# Altium PCB SNA.PcbDoc (part 2 of 6)
Units mm, origin at the board's own origin, x right, y up, seen from the top; angles counter-clockwise.
Board outline 122 x 98 mm, 4 copper layers (L1 Top Layer, L2 Inner 1, L3 Inner 2, L4 Bottom Layer), stack 1.588 mm thick; 466 components, 299 nets, 1366 pads, 4218 vias.
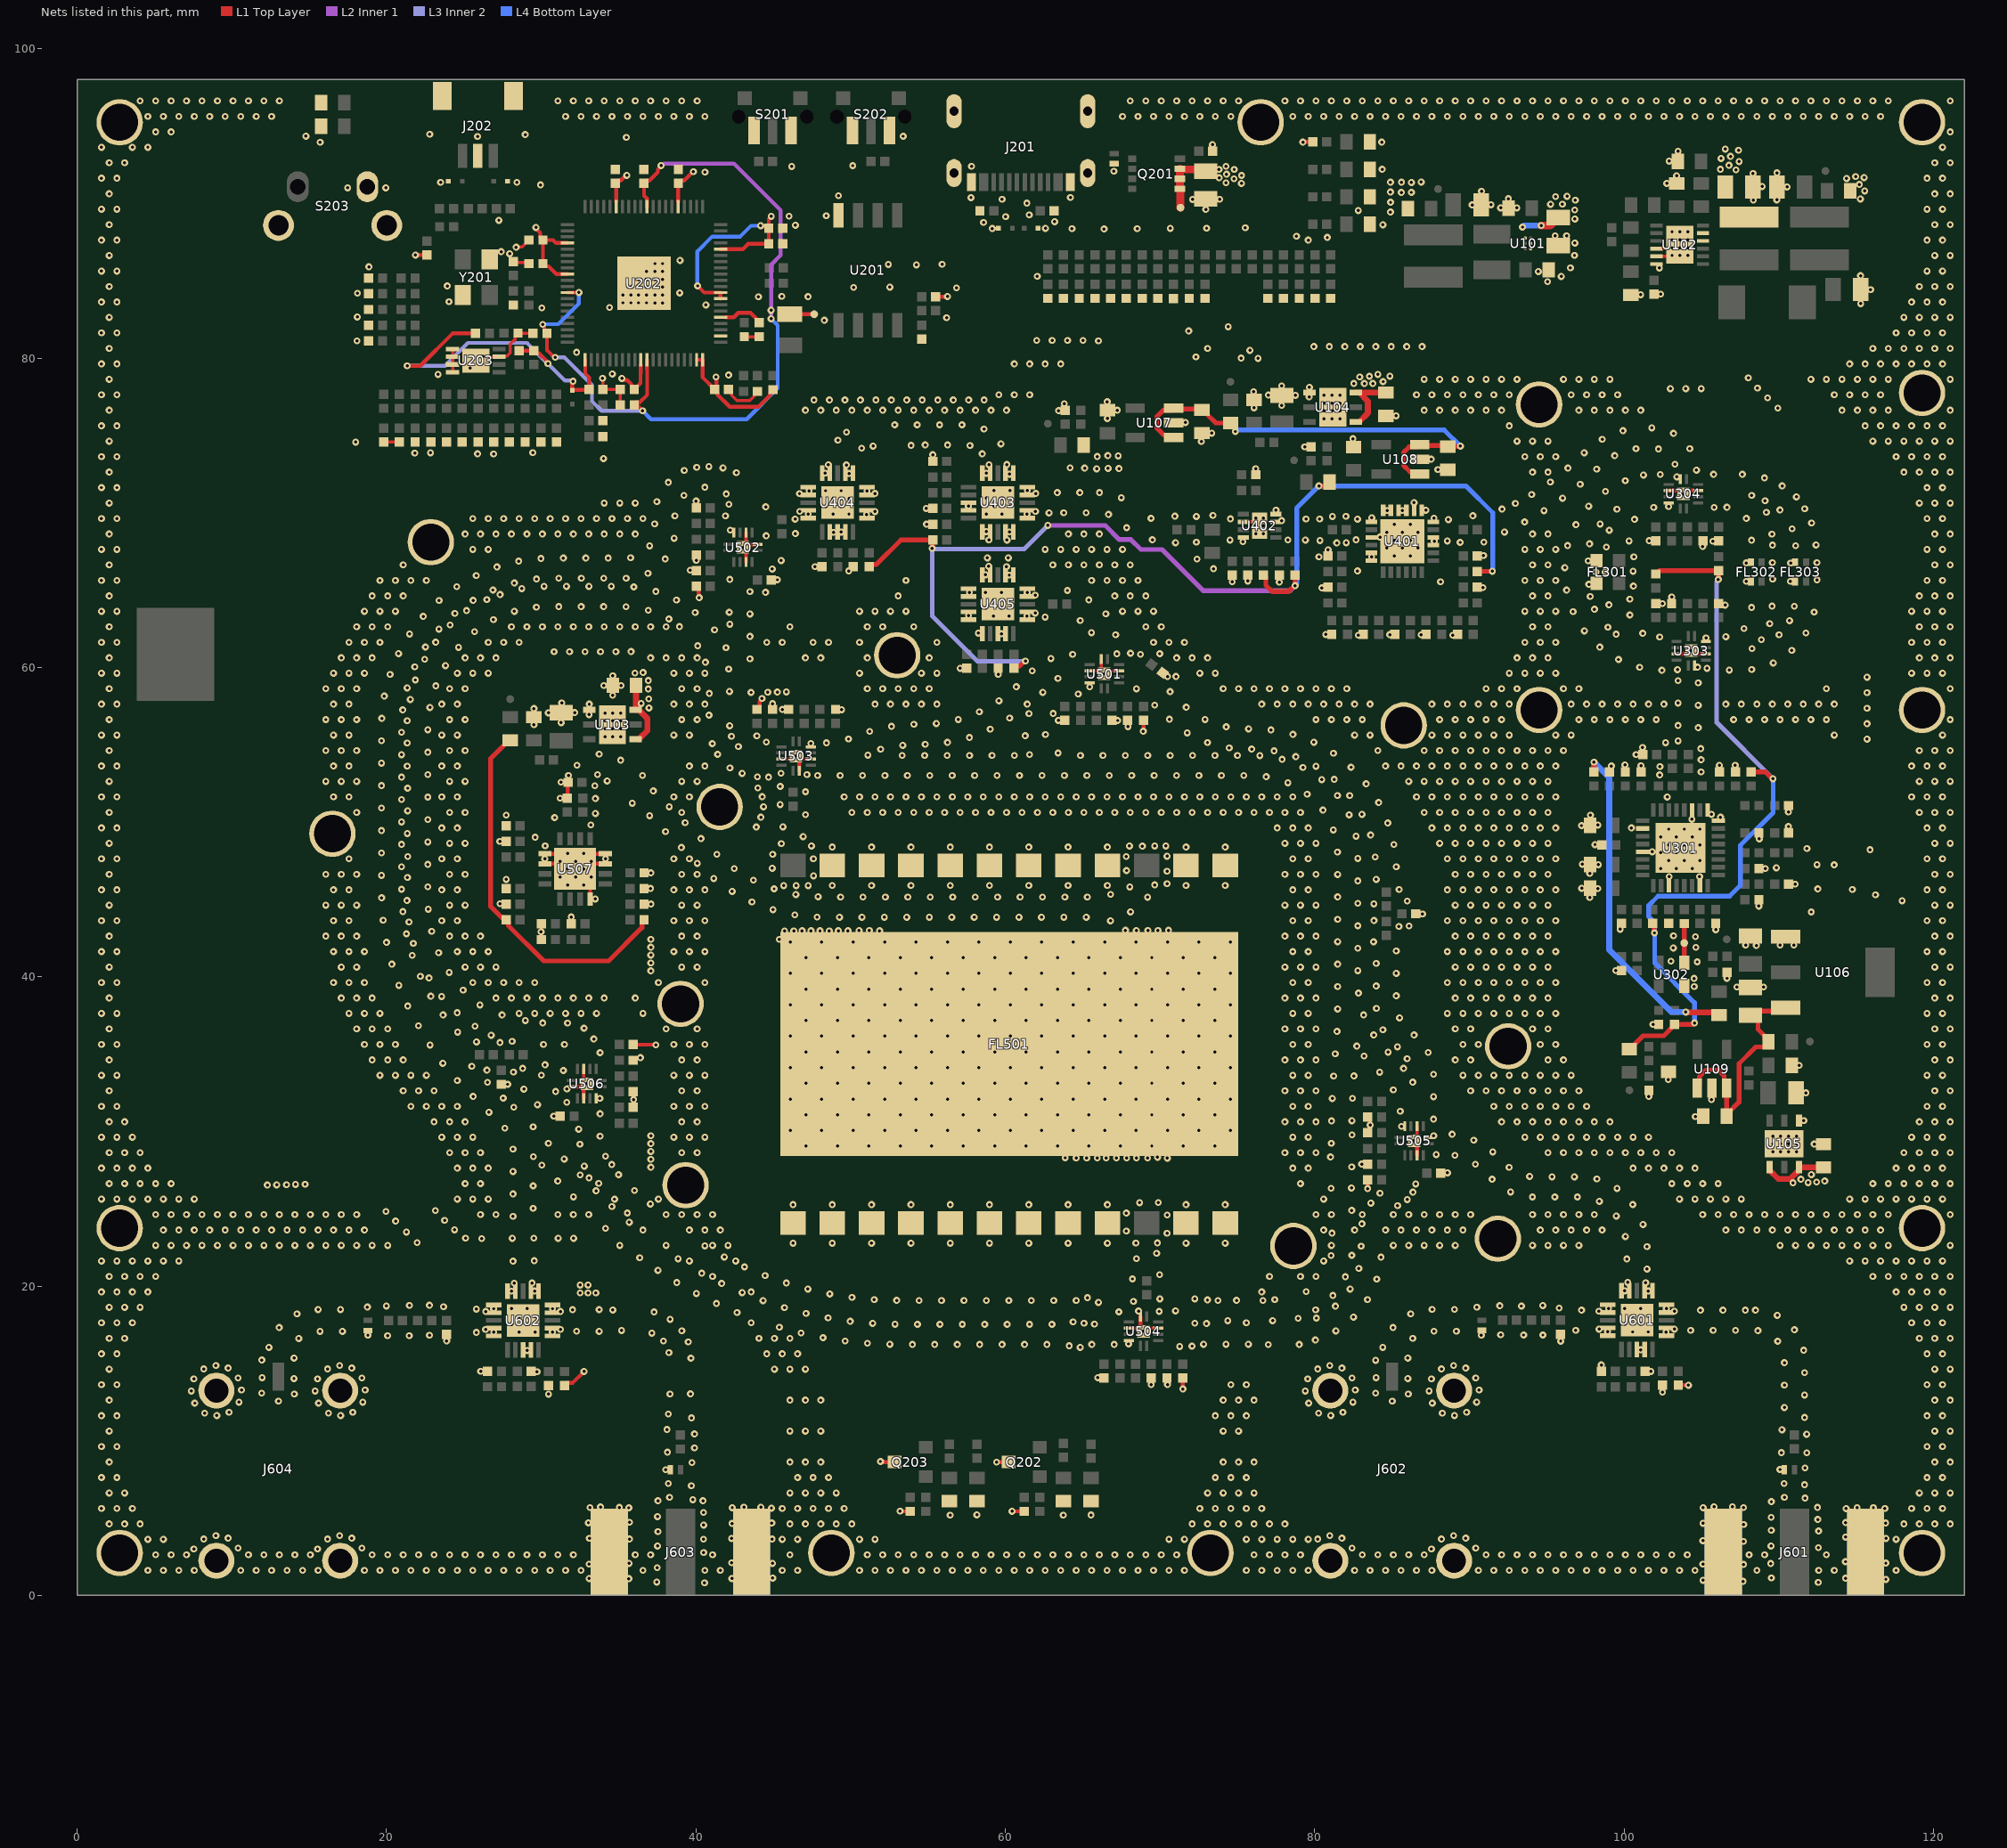
[diagram p4: the nets of this part, all layers, seen from the top]

## Footprints (in the part's own frame and the unit in brackets; to place one, negate y for a bottom-side part, rotate by r counter-clockwise, add the part's x,y. Pads: shape width x height; smd on the part's side, far side on the other; paste and mask are expansions set on the pad) (continued)
QV--IC--QFN-12 [mm]
  rect 0.65x0.2 smd: 1(-0.95,0.2) 2(-0.95,-0.2) 7(0.95,-0.2) 8(0.95,0.2)
  rect 0.2x0.65 smd: 3(-0.6,-0.95) 4(-0.2,-0.95) 5(0.2,-0.95) 6(0.6,-0.95) 9(0.6,0.95) 10(0.2,0.95) 11(-0.2,0.95) 12(-0.6,0.95)
  rect 0.81x0.81 smd: 13(0,0)
  silkscreen extent -1.37,0.7 -1.18,0.9, body extent -0.95,-0.95 0.95,0.95, height 0.6
QV--IC--QFN-20 [mm]
  rect 1x0.3 smd: 1(-1.9,1) 2(-1.9,0.5) 3(-1.9,0) 4(-1.9,-0.5) 5(-1.9,-1) 11(1.9,-1) 12(1.9,-0.5) 13(1.9,0) 14(1.9,0.5) 15(1.9,1)
  rect 0.3x1 smd: 6(-1,-1.9) 7(-0.5,-1.9) 8(0,-1.9) 9(0.5,-1.9) 10(1,-1.9) 16(1,1.9) 17(0.5,1.9) 18(0,1.9) 19(-0.5,1.9) 20(-1,1.9)
  rect 2.1x2.1 smd: 21(0,0)
  silkscreen extent -2.52,1.62 -2.28,1.87, body extent -2,-2 2,2, height 0.85
SAM--CO--BNC7T-J-P-GN-RA-BM1D [mm]
  round 2.325 hole 1.55: 0(-4,-2.247) 0(-4,-13.247) 0(4,-2.247) 0(4,-13.247)
  rect 0.76x1.83 smd: 1(0,-14.147)
  silkscreen extent -7.65,-15 7.65,0, body extent -9.24,-14.74 9.24,19.46, height 13.74
STM--IC--DFN-6 [mm]
  rect 0.8x0.4 smd: 1(-1.5,0.95) 2(-1.5,0) 3(-1.5,-0.95) 4(1.5,-0.95) 5(1.5,0) 6(1.5,0.95)
  rect 1.75x2.5 smd: 7(0,0)
  silkscreen extent -2.02,1.53 -1.77,1.77, body extent -1.55,-1.5 1.55,1.5, height 1
STT--CC--0402 [mm]
  rect 0.6x0.6 smd: 1(-0.45,0) 2(0.45,0)
  silkscreen extent -0.75,-0.3 0.75,0.3, body extent -0.53,-0.28 0.53,0.28, height 0.55
STT--CC--0603 [mm]
  rect 0.8x1 smd: 1(-0.75,0) 2(0.75,0)
  silkscreen extent -1.15,-0.5 1.15,0.5, body extent -0.82,-0.48 0.82,0.48, height 0.95
STT--CC--0805 [mm]
  rect 1x1.5 smd: 1(-0.9,0) 2(0.9,0)
  silkscreen extent -1.4,-0.75 1.4,0.75, body extent -1.1,-0.71 1.1,0.7, height 1.5
STT--CO--142-0701-871 [mm]
  rect 5.6x2.4 smd: 0(-2.8,4.6) 0(-2.8,-4.6)
  rect 5.6x2.4 smd far side: 0(-2.8,4.6) 0(-2.8,-4.6)
  rect 5.6x1.9 smd: 1(-2.8,0)
  silkscreen extent -5.2,-4.8 12.7,4.8, body extent -4.76,-4.76 12.7,4.76, height 5.16
STT--DO--Hole-2.4-3.0#1 [mm]
  round 3 hole 2.4: 1(0,0)
  silkscreen extent -1.5,-1.5 1.5,1.5
STT--DO--Hole-2.4-3.0#2 [mm]
  round 3 hole 2.4: 1(2.75,2.75)
  silkscreen extent -1.5,-1.5 1.5,1.5
STT--DO--Logo-New [mm]
  L1 Top Layer pour cut-out: -5.979,2 -5.979,-2 6,-2 6,2
  L1 Top Layer region: 694 vertices and 0 holes, not listed, extent -4.43,-1.8 -2.967,-0.473
  L1 Top Layer region: 408 vertices and 0 holes, not listed, extent -5.531,0.434 -4.443,0.967
  L1 Top Layer region: 725 vertices and 0 holes, not listed, extent -4.285,-0.437 -2.936,0.967
  L1 Top Layer region: 360 vertices and 0 holes, not listed, extent -5.486,-0.053 -4.471,0.407
  L1 Top Layer region: 701 vertices and 0 holes, not listed, extent 4.792,-0.306 5.758,1.179
  L1 Top Layer region: 193 vertices and 0 holes, not listed, extent 2.991,-0.328 3.686,0.945
  L1 Top Layer region: 406 vertices and 0 holes, not listed, extent -4.29,-0.96 -3.202,-0.423
  L1 Top Layer region: 659 vertices and 0 holes, not listed, extent -2.047,-0.328 -1.284,0.606
  L1 Top Layer region: 359 vertices and 1 holes, not listed, extent -1.13,-0.753 -0.11,0.606
  L1 Top Layer region: 363 vertices and 1 holes, not listed, extent -0.011,-0.328 1.005,0.606
  L1 Top Layer region: 693 vertices and 0 holes, not listed, extent -5.766,0.484 -4.304,1.811
  L1 Top Layer region: 613 vertices and 0 holes, not listed, extent 1.154,-0.328 1.953,0.606
  L1 Top Layer region: -4.304,-0.148 -4.304,-0.757 -4.308,-0.757 -4.308,-0.753 -4.317,-0.753 -4.317,-0.748 -4.331,-0.748 -4.331,-0.744 -4.349,-0.744 -4.349,-0.739 -4.38,-0.739 -4.38,-0.744 -4.398,-0.744 -4.398,-0.748 -4.412,-0.748 -4.412,-0.753 -4.421,-0.753 -4.421,-0.757 -4.43,-0.757 -4.43,-0.098 -4.421,-0.098 -4.421,-0.103 -4.412,-0.103 -4.412,-0.107 -4.398,-0.107 -4.398,-0.112 -4.376,-0.112 -4.376,-0.116 -4.353,-0.116 -4.353,-0.112 -4.331,-0.112 -4.331,-0.107 -4.317,-0.107 -4.317,-0.103 -4.308,-0.103 -4.308,-0.098 -4.304,-0.098 -4.304,-0.143
  L1 Top Layer region: -4.304,0.543 -4.304,0.114 -4.313,0.114 -4.313,0.118 -4.322,0.118 -4.322,0.123 -4.335,0.123 -4.335,0.127 -4.394,0.127 -4.394,0.123 -4.407,0.123 -4.407,0.118 -4.416,0.118 -4.416,0.114 -4.43,0.114 -4.43,0.768 -4.425,0.768 -4.425,0.764 -4.416,0.764 -4.416,0.759 -4.403,0.759 -4.403,0.755 -4.389,0.755 -4.389,0.75 -4.344,0.75 -4.344,0.755 -4.326,0.755 -4.326,0.759 -4.313,0.759 -4.313,0.764 -4.308,0.764 -4.308,0.768 -4.304,0.768 -4.304,0.547
  L1 Top Layer region: 549 vertices and 1 holes, not listed, extent 3.736,-0.328 4.657,0.606
  L1 Top Layer region: 557 vertices and 1 holes, not listed, extent 1.998,-0.328 2.923,0.606
  L1 Top Layer region: 360 vertices and 0 holes, not listed, extent -4.263,-0.396 -3.243,0.064
  L1 Top Layer region: 738 vertices and 0 holes, not listed, extent -5.798,-0.96 -4.443,0.448
  L1 Top Layer keep-out region: -5.979,-2 6,-2 6,2 -5.979,2
STT--DO--SN [mm]
  rect 6x5 smd paste-2539.97: 1(0,0)
  L1 Top Layer pour cut-out: -8.45,1.5 -3.35,1.5 -3.35,-1.5 -8.45,-1.5
STT--DO--STT-Number [mm]
STT--DO--TP-0.5 [mm]
  round 0.5 smd paste-0.25: 1(0,0)
  silkscreen extent -0.25,-0.25 0.25,0.25
STT--FB--0402 [mm]
  rect 0.6x0.6 smd: 1(-0.45,0) 2(0.45,0)
  silkscreen extent -0.75,-0.3 0.75,0.3, body extent -0.5,-0.25 0.5,0.25, height 0.49
STT--LD--0603-green [mm]
  rect 0.8x1 smd: 1(-0.75,0) 2(0.75,0)
  silkscreen extent -1.15,-0.5 1.15,0.5, body extent -0.8,-0.4 0.8,0.4, height 0.71
STT--LD--0603-red [mm]
  rect 0.8x1 smd: 1(-0.75,0) 2(0.75,0)
  silkscreen extent -1.15,-0.5 1.15,0.5, body extent -0.8,-0.4 0.8,0.4, height 0.71
STT--RC--0402 [mm]
  rect 0.6x0.6 smd: 1(-0.45,0) 2(0.45,0)
  silkscreen extent -0.75,-0.3 0.75,0.3, body extent -0.53,-0.28 0.53,0.28, height 0.4
STT--RC--0603 [mm]
  rect 0.8x1 smd: 1(-0.75,0) 2(0.75,0)
  silkscreen extent -1.15,-0.5 1.15,0.5, body extent -0.82,-0.48 0.82,0.48, height 0.5
STT--SD--SMA-DO-214AC [mm]
  rect 1.75x2.2 smd: 1(-2.275,0) 2(2.275,0)
  silkscreen extent -3.25,-1.5 3.25,1.5, body extent -2.74,-1.4 2.74,1.4, height 2.3
TEC--PB--1-1825027-1 [mm]
  round 2 hole 1.3: 0(-5.4,-3.5) 0(-5.4,3.5)
  oval 2x1.4 hole 1: 1(-2.9,-2.25) 2(-2.9,2.25)
  silkscreen extent -6.9,-4.5 5.45,4.5, body extent -6.92,-4.2 5.44,4.2, height 7
TEI--IC--BGA6 [mm]
  round 0.213 smd: A1(-0.175,0.35) A2(0.175,0.35) B1(-0.175,0) B2(0.175,0) C1(-0.175,-0.35) C2(0.175,-0.35)
  silkscreen extent -0.5,0.5 -0.3,0.7, body extent -0.35,-0.53 0.35,0.53, height 0.4
TI--IC--WSON-8 [mm]
  rect 0.7x0.3 smd: 1(-1.05,0.75) 2(-1.05,0.25) 3(-1.05,-0.25) 4(-1.05,-0.75) 5(1.05,-0.75) 6(1.05,-0.25) 7(1.05,0.25) 8(1.05,0.75)
  rect 1x1.7 smd: 9(0,0)
  silkscreen extent -1.53,1.28 -1.28,1.52, body extent -1,-1 1,1, height 0.77
TXI-IC-LMK6CE10000CDLFR [mm] "4-Lead VSON 2.5 mm x 2.0 mm"
  rect 0.9x0.65 smd: 1(-0.75,0.825) 2(-0.75,-0.825) 3(0.75,-0.825) 4(0.75,0.825)
  silkscreen extent -1.7,-0.2 1,0.87, body extent -1.13,-1.25 1.13,1.25, height 1.1
WIB--IC--SOIC8 [mm]
  rect 1.6x0.65 smd: 1(-3.55,1.905) 2(-3.55,0.635) 3(-3.55,-0.635) 4(-3.55,-1.905) 5(3.55,-1.905) 6(3.55,-0.635) 7(3.55,0.635) 8(3.55,1.905)
  silkscreen extent -4.35,2.58 -2.75,2.58, body extent -3.9,-2.62 3.9,2.62, height 1.95

## Part data
C101 C102 C103 C113 C114 C115 C122 C126: library part 200017-1, "Capacitor ceramic 4.7u 25V 10% X7R  SMD--0805", Manufacturer="Samsung Electro-Mechanics", Package=SMD--0805, PartNumber=CL21B475KAFNNNE, Tolerance=10%, Voltage=25V, A-Number=200017, Material=X7R, Status=released, Type="Capacitor ceramic"
C104: library part CMP-010-000027-1, "Capacitor ceramic 10n 50V 5% C0G/NPO  SMD--0603", Manufacturer="Murata Electronics", Package=SMD--0603, PartNumber=GRM1885C1H103JA01D, Tolerance=+/-5%, Voltage=50V, A-Number=TBD, Family Code=1, Generic Specification=COTS, Group Code=2, Material=C0G/NPO, preferred=Yes, Status=active, Type="Capacitor ceramic"
C105 C301 C302 C303 C305 C323 C324 C326 C327 C330 C331 C401 C402 C403 C404 C405 C406 C407 C408 C409 C410 C411 C412 C413 C414 C415 C416 C419 C421 C423 C424 C427 C428 C432 C433 C503 C504 C507 C508 C510 C511 C512 C513 C515 C516 C517 C518 C523 C524 C527 C528 C603 C604 C605 C606 C607 C608: library part CMP-010-000109-1, "Capacitor ceramic 100p 50V 5% C0G AEC-Q200 SMD--0402", Manufacturer="Samsung Electro-Mechanics", Package=SMD--0402, PartNumber=CL05C101JB51PND, Component Category=Generic, Meta Data Version=v1.0, Status=released, Type="Capacitor ceramic"
C106: library part CMP-010-000008-3, "Capacitor ceramic 10u 25V 20% X5R  SMD--0603", Manufacturer="Murata Electronics", Package=SMD--0603, PartNumber=GRM188R61E106MA73D, Tolerance=20%, Voltage=25V, A-Number=200041, Family Code=1, Generic Specification=COTS, Group Code=2, Material=X5R, Status=released, Type="Capacitor ceramic"
C107 C108 C109: library part CMP-010-000114-1, "Capacitor ceramic 22u 25V 20% X5R  SMD--0805", Manufacturer="TAIYO YUDEN", Package=SMD--0805, PartNumber=MSAST21GBB5226MTNC12, Tolerance=20%, Voltage=25V, Component Category=generic, Material=X5R, Meta Data Version=v1.0, Status=released, Type="Capacitor ceramic"
C110 C111 C112 C116 C117 C118 C119 C120 C121 C123 C124 C125 C312 C313 C316: library part CMP-010-000042-2, "CAP CER 1UF 35V X7R 0603 10%", Manufacturer="TDK Corporation", PartNumber=C1608X7R1V105K080AC, E-Nummer=-, Special="0603 SMD", Status=released
C127 C128 C129 C130 C131 C203 C209 C210 C211 C212 C213 C214 C215 C216 C217 C218 C219 C222 C306 C307 C308 C309 C310 C311 C315 C319 C322 C325 C328 C417 C420 C422 C425 C429 C434 C435 C505 C506 C509 C514 C519 C520 C525 C526 C529 C530 C609 C610: library part 200032-3, "Capacitor ceramic 100n 16V 10% X7R  SMD--0402", Manufacturer="Samsung Electro-Mechanics", Package=SMD--0402, PartNumber=CL05B104KO5NNNC, Tolerance=10%, Voltage=16V, A-Number=200032, Material=X7R, Status=released, Type="Capacitor ceramic"
C201 C202: library part CMP-010-000103-1, "Capacitor ceramic 15p 50V 1% C0G  SMD--0402", Manufacturer=Yageo, Package=SMD--0402, PartNumber=CQ0402FRNPO9BN150, Tolerance=1%, Voltage=50V, Material=C0G, Status=released, Type="Capacitor ceramic"
C204 C531 C532: library part CMP-010-000007-3, "Capacitor ceramic 10n 35V 2% C0G SMD--0402", Manufacturer="Murata Electronics", Package=SMD--0402, PartNumber=GRM1555CYA103GE01, Tolerance=2%, Voltage=35V, A-Number=200032, Material=C0G, Status=released, Type="Capacitor ceramic"
C205 C206 C207 C208: library part 200037-1, "Capacitor ceramic 4.7u 6.3V 20% X5R  SMD--0402", Manufacturer="Murata Electronics", Package=SMD--0402, PartNumber=GRM155R60J475ME47D, Tolerance=20%, Voltage=6.3V, A-Number=200037, Material=X5R, Status=released, Type="Capacitor ceramic"
C304 C314 C320 C329 C418 C426 C501 C502 C521 C522 C533 C534 C611 C612 C613 C614: library part CMP-010-000105-1, "Capacitor ceramic 470p 50V 5% C0G  SMD--0402", Manufacturer=TDK, PartNumber=CGA2B2C0G1H471J050BA, Component Category=Generic, Meta Data Version=v1.0, Status=released
C317: library part CMP-010-000104-2, "Capacitor ceramic 180p 50V 5% C0G  SMD--0402", Manufacturer="Samsung Electro-Mechanics", Package=SMD--0402, PartNumber=CL05C181JB5NNNC, Tolerance=5%, Voltage=50V, Component Category=Generic, Material=C0G, Meta Data Version=v1.0, Status=released, Type="Capacitor ceramic"
C318: library part CMP-010-000108-1, "Capacitor ceramic 3.3n 50V 10% X7R AEC-Q200 SMD--0402", Manufacturer="Samsung Electro-Mechanics", Package=SMD--0402, PartNumber=CL05B332KB5VPNC, Component Category=Generic, Meta Data Version=v1.0, Status=released, Type="Capacitor ceramic"
C321: library part 200042-1, "Capacitor ceramic 18p 50V 5% C0G  SMD--0402", Manufacturer="Samsung Electro-Mechanics", Package=SMD--0402, PartNumber=CL05C180JB5NNNC, Tolerance=5%, Voltage=50V, A-Number=200042, Material=C0G, Status=released, Type="Capacitor ceramic"
D101: library part CMP-039-000054-1, "Schottky Diode SSA24-E3/61T 40V 2A", Current=2A, Manufacturer=Vishay, Voltage=40V, Component Category=generic, Meta Data Version=v1.0, PartNumber=SSA24-E3/61T, Status=released, Type="Schottky Diode"
D201 D202 D203 D204 D205: library part 400052-1, "TVS Diode ESD9R3.3ST5G 3V3  0.5pF, 1nA SMD--SOD-923", Manufacturer="ON Semiconductors", Package=SMD--SOD-923, PartNumber=ESD9R3.3ST5G, Power=150mW, Voltage=3V3, A-Number=400052, preferred=yes, Special="0.5pF, 1nA", Status=active, Type="TVS Diode"
D206: library part 400015-1, "LED 150060RS75000 2V 30mA Red 630nm 250mcd 140° SMD--0603", Current=30mA, Manufacturer="Wuert Elektronik", Package=SMD--0603, Voltage=2V, A-Number=400015, PartNumber=150060RS75000, preferred=yes, Special="Red 630nm 250mcd 140°", Status=active, Type=LED
D207 D208 D209 D210 D211 D212 D213 D214 D215: library part 400014-1, "LED 150060GS75000 3.2V 30mA Green 515nm 430 mcd 140° SMD--0603", Current=30mA, Manufacturer="Wuert Elektronik", Package=SMD--0603, Voltage=3.2V, A-Number=400014, PartNumber=150060GS75000, Special="Green 515nm 430 mcd 140°", Status=released, Type=LED
D216 D601 D602 D603 D604: library part CMP-039-000055-1, "TVS Diode, 7V, 0.1pF", Manufacturer=Littelfuse, Component Category=Generic, Meta Data Version=v1.0, PartNumber=SESD0402X1BN-0010-098, Status=released, Type="TVS Diode"
FB1: library part 800002-6, "Fabrication Object STTNumber SMD--STTNumber", Package=SMD--STTNumber, PartNumber=STTNumber, preferred=Yes, Status=active, Type="Fabrication Object"
FB2: library part CMP-042-000002-6, "Fabrication Object Logo STT NG SMD--LOGO", Package=SMD--LOGO, A-Number=800071, PartNumber="Logo STT NG Tiny", Status=draft, Type="Fabrication Object"
FB3: library part 800001-6, "Fabrication Object SN: SMD--SN", Package=SMD--SN, A-Number=800001, PartNumber=SN:, preferred=Yes, Status=active, Type="Fabrication Object"
FL301: library part CMP-011-000006-1, "Low Pass Filter 3500MHz 50 Ohms", Manufacturer="KYOCERA AVX", Component Category=Generic, Meta Data Version=v1.0, PartNumber=LP0805A3500AWTR, Status=released
FL302: library part CMP-011-000005-4, "Low Pass Filter 1747MHz 50 Ohms", Manufacturer="KYOCERA AVX", Component Category=Generic, Meta Data Version=v1.0, PartNumber=LP0603A1747ANTR, Status=released
FL303: library part CMP-011-000007-2, "Low Pass Filter 947MHz 50 Ohms", Manufacturer="KYOCERA AVX", Component Category=Generic, Meta Data Version=v1.0, PartNumber=LP0603A0947ANTR, Status=released
FL501: library part CMP-042-000029-3, "Directional Coupler, 50 MHz to 6 GHz, 50 Ohms, SMD", Manufacturer=Mini-Circuits, Component Category=Generic, Meta Data Version=v1.0, PartNumber=SEDC-10-63+, Status=released, Type="Directional Coupler"
J201: library part CMP-205-000000-4, "Connector USB 2171790001 Type C f MOL--CO--2171790001", Manufacturer=Molex, PartNumber=2171790001, Special="USB 2.0", Status=draft, Type="Connector USB"
J202: library part CMP-023-000161-3, "Connector SM03B-SRSS-TB SMD, 90°, Raspberry JST Debug", Manufacturer=JST, Component Category=generic, Meta Data Version=v1.0, PartNumber=SM03B-SRSS-TB, Status=released, Type=Connector
J601 J603: library part 600000-2, "Connector Coaxial 142-0701-871 SMA f  Edge--142-0701-871", Manufacturer="Chinch Connectivity Solutions Johnson", Package=Edge--142-0701-871, PartNumber=142-0701-871, A-Number=600000, E-Number=E-000'342, preferred=yes, Status=active, Type="Connector Coaxial"
J602 J604: library part CMP-023-000176-1, "Connector Coaxial BNC7T-J-P-GN-RA-BM1D BNC jack right angle 75Ohm", Manufacturer=Samtec, PartNumber=BNC7T-J-P-GN-RA-BM1D, Component Category=Generic, Meta Data Version=v1.0, Special="right angle", Status=released, Type="Connector Coaxial"
L101 L103 L104: library part 300008-1, "Inductor SRP4020FA-2R2M 2.2u 3.1A 21.35mR 38MHz SMD--SRP4020FA", Current=3.1A, Manufacturer=Bourns, Package=SRP4020FA-2R2M, A-Number=300008, PartNumber=SRP4020FA-2R2M, preferred=yes, Special="21.35mR 38MHz", Status=active, Type=Inductor
L102: library part 300013-1, "Inductor DFE252012F-R47M=P2 470n 7.4A 17mR  SMD--2520", Current=7.4A, Manufacturer="Murata Electronics", Package=DFE252012F-R47M=P2, A-Number=300013, PartNumber=DFE252012F-R47M=P2, preferred=yes, Special=17mR, Status=active, Type=Inductor
L105 L106 L107 L108 L109 L110 L111 L201 L202 L205 L301 L302 L303 L304 L305 L306 L401 L402 L404 L405 L406 L407 L501 L502 L503 L504 L505 L506 L507 L508 L601 L602: library part 300015-1, "Ferrit Bead MPZ1005S330HT000 33E 3A 22mE SMD--0402", Current=3A, Manufacturer="TDK Group", Package=MPZ1005S330HT000, A-Number=300015, PartNumber=MPZ1005S330HT000, preferred=Yes, Special=22mE, Status=active, Type="Ferrit Bead"
L203: library part CMP-012-000029-1, "Inductor AOTA-B201610S3R3-101-T 3.3u 2.1A 140mOhm", Manufacturer=ABRACON, PartNumber=AOTA-B201610S3R3-101-T, Component Category=generic, Meta Data Version=v1.0, Status=released, Type=Inductor
L403: library part CMP-012-000031-2, "Inductor 100nH 290mA AEC-Q200  SMD--0603", Manufacturer=Coilcraft, PartNumber=0603DC-R10XJRW, Component Category=generic, Meta Data Version=v1.0, Status=released, Type=Inductor
M1 M2 M3 M4 M5 M6 M7 M8 M9 M10 M11 M12 M13 M14 M15 M16 M17 M18 M19 M20 M21 M22 M23: library part 800035-1, "Hole  THT--Hole 2.4 / 3.0", Package=THT--Hole, A-Number=800035, poly_direct_connect=true, preferred=Yes, Special="2.4 / 3.0", Status=released, Type=Hole
Q201: library part CMP-054-000007-3, "MOSFET, P-channel, 60 V, -4.8 A", Manufacturer=Diodes, PartNumber=DMP6050SFG-13, Status=released, Type="Transistor, MOSFET, P"
Q202 Q203: library part CMP-054-000009-3, "MOSFET P-CH 50V 180MA TO236AB", Manufacturer="Nexperia USA Inc.", E-Nummer=-, PartNumber=BSS84AK,215, Status=released
R101: library part CMP-009-000253-1, "Resistor 249k 75V 0.1W 0.1% SMD--0603", Manufacturer=YAGEO, Package=SMD--0603, PartNumber=RT0603BRD07249KL, Power=0.1W, Tolerance=0.1%, Component Category=generic, Meta Data Version=v1.0, Status=released, Type=Resistor
R102: library part CMP-009-000254-1, "Resistor 620E 75V  0.1W 0.1% ±25ppm/°C SMD--0603", Manufacturer=Yageo, Package=SMD--0603, PartNumber=RT0603FRE07620RL, Power=0.1W, Tolerance=1%, Voltage=75V, Component Category=generic, Meta Data Version=v1.0, Special=±50ppm/°C, Status=released, Type=Resistor
R103 R105: library part 100072-3, "Resistor 10k 75V  0.1W 0.1% 25ppm SMD--0603", Manufacturer=Susumu, Package=SMD--0603, PartNumber=RG1608P-103-B-T5, Power=0.1W, Tolerance=0.1%, Voltage=75V, A-Number=100072, Family Code=10, Generic Specification=COTS, Group Code=9, preferred=yes, Special=25ppm, Status=active, Type=Resistor
R104: library part CMP-009-000255-1, "Resistor 38.3k 75V  0.1W 0.1%  SMD--0603", Manufacturer=Yageo, Package=SMD--0603, PartNumber=RT0603BRD0738K3L, Voltage=75V, Component Category=generic, Meta Data Version=v1.0, Status=released, Type=Resistor
R106: library part 100023-3, "Resistor 4.7k 75V  0.1W 1%  SMD--0603", Package=SMD--0603, Power=0.1W, Tolerance=1%, Voltage=75V, A-Number=100023, Family Code=10, Generic Specification=COTS, Group Code=9, preferred=no, Status=obsolete, Type=Resistor
R107 R108 R109 R110 R111 R112 R113 R114 R115: library part 100055-3, "Resistor 0E 75V  0.125W   SMD--0603", Manufacturer=Vishay, Package=SMD--0603, PartNumber=MCT06030Z0000ZP500, Power=0.125W, Voltage=75V, A-Number=100055, Family Code=10, Generic Specification=COTS, Group Code=9, preferred=yes, Status=active, Type=Resistor
R201 R202 R203 R260 R263 R537 R538: library part 100077-2, "Resistor 1k 50V  0.063W 1%  SMD--0402", Manufacturer=Panasonic, Package=SMD--0402, PartNumber=ERJ-2RKF1001X, Power=0.063W, Tolerance=1%, Voltage=50V, A-Number=100077, Status=released, Type=Resistor
R204 R206 R228 R261 R264 R301 R302 R303 R304 R312 R313 R315 R316 R317 R318 R319 R320 R401 R402 R403 R404 R405 R406 R407 R408 R409 R410 R411 R412 R413 R501 R502 R503 R504 R505 R506 R507 R508 R511 R512 R513 R514 R517 R518 R521 R522 R525 R526 R527 R528 R531 R532 R533 R534 R536 R601 R602 R603 R604: library part 100086-1, "Resistor 10k 50V  0.063W 1%  SMD--0402", Manufacturer=Panasonic, Package=SMD--0402, PartNumber=ERJ-2RKF1002X, Power=0.063W, Tolerance=1%, Voltage=50V, A-Number=100086, Status=released, Type=Resistor
R205 R207 R305: library part CMP-009-000042-2, "Resistor 5.1k 50V  0.063W 1%  SMD--0402", Manufacturer=Panasonic, Package=SMD--0402, PartNumber=ERJ-2RKF5101X, Power=0.063W, Tolerance=1%, Voltage=50V, Status=released, Type=Resistor
R208: library part 100061-1, "Resistor 33E 50V  0.063W 0.5%  SMD--0402", Manufacturer=Panasonic, Package=SMD--0402, PartNumber=ERA-2AKD330X, Power=0.063W, Tolerance=0.5%, Voltage=50V, A-Number=100061, Status=released, Type=Resistor
R209 R223 R224 R225 R226 R227 R258 R259 R262 R519 R520: library part CMP-009-000263-1, "Resistor 71.5E 50V 0.0625W 0.1% SMD--0402", Manufacturer=Panasonic, PartNumber=ERA-2AEB71R5X, Component Category=Generic, Meta Data Version=v1.0, Status=released
R210 R211 R212 R213 R214 R215 R216 R217 R218 R219 R220 R221 R231 R232 R233 R234 R235 R236 R237 R238 R239 R240 R241 R242 R243 R244 R245 R246 R247 R248 R249 R250 R251 R252 R253 R254 R255 R265 R266 R314: library part 100068-1, "Resistor 100E 50V  0.063W 0.01  SMD--0402", Manufacturer=Vishay, Package=SMD--0402, PartNumber=CRCW0402100RFKEDC, Power=0.063W, Tolerance=0.01, Voltage=50V, A-Number=100068, Status=released, Type=Resistor
R222: library part 100075-2, "Resistor 200E 50V  0.063W 1%  SMD--0402", Manufacturer=Panasonic, Package=SMD--0402, PartNumber=ERJ-2RKF2000X, Power=0.063W, Tolerance=1%, Voltage=50V, A-Number=100075, Status=released, Type=Resistor
R229 R230: library part 100078-1, "Resistor 4.7k 50V  0.063W 1%  SMD--0402", Manufacturer=Panasonic, Package=SMD--0402, PartNumber=ERJ-2RKF4701X, Power=0.063W, Tolerance=1%, Voltage=50V, A-Number=100078, Status=released, Type=Resistor
R256 R257: library part 100092-3, "Resistor 27E 50V  0.063W 1%  SMD--0402", Manufacturer=Vishay, PartNumber=CRCW040227R0FKED, Component Category=Generic, Meta Data Version=V1.0, Status=released
R306 R307 R308 R509 R510 R529 R530: library part CMP-009-000262-1, "Resistor 49.9E 50V 0.1W 1% SMD--0402", Manufacturer="SEI Stackpole", PartNumber=RNCP0402FTD49R9, Component Category=Generic, Meta Data Version=v1.0, Status=released
R309: library part CMP-009-000258-1, "Resistor 1.8k 50V  0.063W 1%  SMD--0402", Manufacturer="SEI Stackpole", Package=SMD--0402, PartNumber=RMCF0402FT1K80, Power=0.063W, Tolerance=1%, Voltage=50V, Component Category=Generic, Meta Data Version=v1.0, Status=released, Type=Resistor
R310: library part CMP-009-000257-2, "Resistor 82E 25V  0.063W 0.5%  SMD--0402", Manufacturer=Vishay, PartNumber=RR0510R-820-D, Component Category=Generic, Meta Data Version=v1.0, Status=released, Type=Resistor
R311: library part 100076-2, "Resistor 330E 50V  0.063W 1%  SMD--0402", Manufacturer=Panasonic, Package=SMD--0402, PartNumber=ERJ-2RKF3300X, Power=0.063W, Tolerance=1%, Voltage=50V, A-Number=100076, Status=released, Type=Resistor
R515 R516 R523 R524: library part CMP-009-000261-1, "Resistor 15.4E 50V 0.1W 0.1% SMD--0402", Manufacturer="TE Connectivity", PartNumber=RP73PF1E15R4BTDF, Component Category=Generic, Meta Data Version=v1.0, Status=released
R535: library part CMP-009-000265-1, "Resistor 52.3E 50V 0.1W 0.1% SMD--0402", Manufacturer="TE Connectivity", PartNumber=RP73PF1E52R3BTD, Component Category=Generic, Meta Data Version=v1.0, Status=released, Type=Resistor
R539: library part 100089-1, "Resistor 499E 50V  0.063W 1%  SMD--0402", Manufacturer=Yageo, Package=SMD--0402, PartNumber=RC0402FR-07499RL, Power=0.063W, Tolerance=1%, Voltage=50V, A-Number=100089, Status=released, Type=Resistor
R605 R606: library part CMP-009-000267-1, "Resistor 86.6E 50V 0.1W 0.1% SMD--0402", Manufacturer="TE Connectivity", PartNumber=RP73PF1E86R6BTD, Component Category=Generic, Meta Data Version=v1.0, Status=released, Type=Resistor
R607 R608: library part CMP-009-000266-1, "Resistor 43.2E 50V 0.1W 0.1% SMD--0402", Manufacturer="TE Connectivity", PartNumber=RP73PF1E43R2BTD, Component Category=Generic, Meta Data Version=v1.0, Status=released, Type=Resistor
S201 S202: library part CMP-033-000000-2, "Pushbutton PTS845 90° SMD", Manufacturer=C&K, Package=SMD, PartNumber=PTS845VM20PSMTR4-LFS, Special=90°, Type=Pushbutton
S203: library part 700081-1, "Pushbutton 1-1825027-1 24V 50mA 90° THT-4pin", Current=50mA, Manufacturer="TE Connectivity", Package=THT-4pin, PartNumber=1-1825027-1, A-Number=700081, preferred=yes, Special=90°, Status=active, Type=Pushbutton
TP101 TP102 TP103 TP104 TP105 TP106 TP107 TP108 TP109 TP201 TP202 TP301: library part CMP-043-000000-4, "Pad TP SMD--Pad 0.5", Package=SMD--Pad, PartNumber=TP, preferred=Yes, Special=0.5, Status=active, Type=Pad
U101: library part CMP-091-000047-3, "DCDC Buck Converter 1.75-V to 5.5-V input 1-A ultra-low IQ", Manufacturer="Texas Instruments", Component Category=generic, Meta Data Version=v1.0, PartNumber=TPS62802YKA, Status=released
U102: library part CMP-091-000046-2, "Switching Voltage Regulators 3.5A 1MHz High Efficiency Boost Regulator with OVP & Softstart", Manufacturer=Microchip, Component Category=generic, Meta Data Version=v1.0, PartNumber=MIC2253-06YML, Status=released
U103 U104 U105: library part CMP-091-000048-1, "LDO 1.2A Low Drop Linear Regulator IC", Manufacturer=STMicroelectronics, Component Category=generic, Meta Data Version=v1.0, PartNumber=LDL212PU50R, Status=released
U106: library part CMP-091-000049-1, "LDO 3.3V Fixed 1A Low Noise CMOS LDO Regulator With Enable", Manufacturer="Diodes Incoporated", Component Category=generic, Meta Data Version=v1.0, PartNumber=AP2114H-3.3TRG1, Status=released
U107 U108 U109: library part CMP-091-000050-1, "LDO 3.3V Fixed 200 mA", Manufacturer=onsemi, Component Category=generic, Meta Data Version=v1.0, PartNumber=NCP702SN33T1G, Status=released
U201: library part CMP-117-000001-2, "NOR-Flash Memory W25Q128JVSIQ TR SPI SMD--SOIC8", Manufacturer=Winbond, Voltage=3.3V, Component Category=generic, Meta Data Version=v1.0, PartNumber="W25Q128JVSIQ TR", Special=SPI, Status=released, Type=Flash
U202: library part CMP-023-000160-3, "MCU RP2350B 150MHz clock Dual Arm Cortex-M33 cores 520KB RAM 8KB on-chip QFN-80", Manufacturer="Raspberry Pi Foundation", Component Category=generic, Meta Data Version=v1.0, PartNumber=SC1510(13)-A4, Status=released, Type=MCU
U203: library part CMP-117-000000-2, "EEPROM 24AA32AT 32K SMD--DFN", Manufacturer="Microchip Technology", Package=SMD--DFN, PartNumber=24AA32AT-I/MC, Voltage=1.7-5.5V, A-Number=500053, preferred=yes, Special=32K, Status=active, Type=EEPROM
U301: library part CMP-038-000007-2, "MAX2871ETJ+T PLL 23.5MHz to 6000MHz", Manufacturer="Analog Devices", Component Category=generic, Meta Data Version=v1.0, PartNumber=MAX2871ETJ+T, Status=released, Type=Oscillator
U302: library part CMP-038-000005-2, "LMK6CE10000CDLFR low jitter 100MHz 3.3V LVCMOS, no load max.: 62mA", Manufacturer="Texas Instruments", Voltage="2.5V - 3.3 V", Component Category=Generic, Meta Data Version="Meta Data Version v1.0", PartNumber=LMK6CE10000CDLFR, Special=LVCMOS, Status=released, Type=Oscillator
U303 U304 U501 U502 U503 U504 U505 U506: library part CMP-081-000011-1, "RF Switch RFSW6042TR7  5-6000MHz SP4T Iso 36dB @925MHz", Manufacturer=Qorvo, Component Category=Generic, Meta Data Version=v1.0, PartNumber=RFSW6042TR7, Status=released, Type=RF-Switch
U401: library part CMP-153-000013-1, "Attenuator HMC1119LP4ME, -2...-32dBm, 0.1-6Ghz", Manufacturer="Analog Devices", Component Category=Generic, Meta Data Version=v1.0, PartNumber=HMC1119LP4ME, Status=released, Type=Attenuator
U402: library part CMP-153-000014-1, "Amp TRF37A73IDSGR, +12dB, 0.1-6Ghz", Manufacturer="Texas Instruments", Component Category=Generic, Meta Data Version=v1.0, PartNumber=TRF37A73IDSGR, Status=released, Type=Amp
U403 U404 U405 U601 U602: library part CMP-081-000012-1, "RF Switch QPC6324TR13  5-6000MHz SPDT", Manufacturer=Qorvo, Component Category=Generic, Meta Data Version=v1.0, PartNumber=QPC6324TR13, Status=released, Type=RF-Switch
U507: library part CMP-042-000030-1, "HF-Detector 1MHz to 8GHz", Manufacturer="Analog Devices", Component Category=Generic, Meta Data Version=v1.0, PartNumber=AD8318SCPZ-EP-RL7, Status=released, Type=HF-Detector
Y201: library part CMP-038-000006-1, "Crystal ABM8-272-T3 12.0000MHZ 10PF SMD--ABSL2", Manufacturer="Abracon LLC", Tolerance=30ppm, PartNumber=ABM8-272-T3, Status=released, Type=Crystal

## Via types
v1: diameter 0.45, hole 0.2, L1 Top Layer to L4 Bottom Layer, tented both sides, 4218 vias

## Nets (pads, with @x,y where several pads share a name; then routed paths per layer and width w, separated by ;. In a path a pad name is that pad's centre, name@x,y a point inside that pad or via, vN(x,y) a via of type N, cw(c..) or ccw(c..) an arc to the next point about the centre after c; other vN are vias at no path point)
1.1V: C206.2 C208.2 C209.2 C210.2 L203.1 TP202.1 U202.10 U202.32 U202.51 U202.65 | length 56.9
  L1 Top Layer w0.254: v1(30.097,82.175) 30.097,82.122 30.195,82.025 30.195,81.777 C208.2@30.363,81.609 ; C208.2@30.368,81.604 30.368,80.515 30.737,80.146 30.751,80.146 30.799,80.098 30.849,80.048 v1(30.902,80.048) ; U202.32@31.691,84.235 31.693,84.237 32.435,84.237 v1(32.436,84.238) ; v1(36.552,76.595) 36.184,76.962 C210.2@36.01,76.962 36.183,77.135 36.36,77.135 36.845,77.62 36.845,79.227 36.841,79.231 U202.51@36.841,79.885 ; U202.10@36.841,89.785 36.841,90.063 36.821,90.083 36.821,90.326 36.641,90.505 C209.2@36.641,91.302 36.814,91.475 36.99,91.475 37.535,92.02 37.535,92.198 37.744,92.407 v1(37.744,92.445) ; U202.65@41.889,82.641 42.446,82.641 42.729,82.924 43.526,82.924 43.922,82.528 43.922,82.457 C206.2@44.095,82.284 ; L203.1@46.052,82.834 46.057,82.828 TP202.1@47.641,82.828
  L2 Inner 1 w0.254: v1(37.744,92.445) 37.797,92.445 37.932,92.58 42.443,92.58 45.466,89.558 45.466,86.649 44.857,86.04 44.857,83.669 44.855,83.667 v1(44.855,82.543)
  L3 Inner 2 w0.254: v1(30.902,80.048) 31.49,80.048 32.616,78.922 33.274,78.264 33.274,77.216 33.895,76.595 v1(36.552,76.595)
  L4 Bottom Layer w0.254: v1(30.097,82.175) 30.114,82.193 30.799,82.193 31.097,82.193 32.436,83.532 v1(32.436,84.238) ; v1(36.552,76.595) 37.097,76.05 43.284,76.05 45.282,78.048 45.282,82.113 44.855,82.54 v1(44.855,82.543)
  other v1: 44.856,83.089
3.3V: C211.2 C212.2 C213.2 C214.2 C215.2 C216.2 C217.2 C218.2 C219.2 D205.2 L201.1 L202.1 L205.2 Q202.3 Q203.3 R107.2 R224.2 R228.2 R229.2 R230.2 R261.2 R264.2 U202.5 U202.15 U202.24 U202.29 U202.41 U202.50 U202.59 U202.60 U202.68 U202.69 U202.76 | length 65.7
  L1 Top Layer w0.254: v1(21.336,79.502) 22.182,79.502 24.289,81.609 L205.2@25.754,81.609 ; v1(21.873,86.659) 22.593,86.659 R228.2@22.606,86.672 ; R229.2@28.569,80.485 R230.2@29.51,80.485 29.683,80.312 29.855,80.312 30.395,79.772 30.395,79.682 v1(30.432,79.645) ; v1(29.649,88.44) 29.649,88.387 29.937,88.099 29.937,87.803 C213.2@30.11,87.63 ; U202.29@31.691,85.435 30.972,85.435 30.474,85.933 30.283,85.933 C211.2@30.11,86.106 C213.2@30.11,87.63 ; U202.24@31.691,87.435 30.949,87.435 30.754,87.63 C213.2@30.11,87.63 ; v1(32.047,78.502) 32.047,78.449 32.004,78.407 D205.2@32.004,77.92 32.027,77.943 33.043,77.943 C214.2@33.078,77.978 33.078,78.761 32.841,78.998 U202.41@32.841,79.885 ; U202.15@34.844,90.083 34.844,91.256 C215.2@34.798,91.302 34.971,91.475 35.134,91.475 35.469,91.809 v1(35.522,91.809) ; v1(35.209,78.686) 35.263,78.686 35.365,78.583 35.545,78.583 35.837,78.291 35.837,78.151 C216.2@36.01,77.978 36.413,78.381 36.413,78.98 36.435,79.002 U202.50@36.435,79.587 ; U202.5@38.84,90.083 38.84,91.28 39.035,91.475 39.23,91.475 39.805,92.05 v1(39.835,92.05) ; U202.59@40.041,79.885 U202.60@40.441,79.885 40.441,78.743 C217.2@41.206,77.978 ; v1(40.105,84.667) 40.537,84.235 U202.69@41.591,84.235 U202.68@41.591,83.835 ; v1(41.298,78.782) 41.324,78.756 41.324,78.096 C217.2@41.206,77.978 ; U202.76@41.591,87.035 43.029,87.035 43.37,87.376 C218.2@44.704,87.376 C219.2@44.704,88.392 44.578,88.518 44.223,88.518 v1(44.186,88.555) ; C219.2@44.704,88.518 44.704,89.003 v1(44.862,89.16) ; L202.1@44.982,77.958 44.809,77.785 44.809,77.612 44.04,76.843 42.182,76.843 41.379,77.645 41.379,77.805 C217.2@41.206,77.978 ; v1(51.925,8.661) 51.962,8.624 Q203.3@52.848,8.624 ; v1(53.194,5.446) 53.202,5.438 R264.2@53.848,5.438 ; L201.1@55.489,83.96 56.23,83.96 v1(56.252,83.981) ; v1(59.426,8.62) 60.21,8.62 Q202.3@60.214,8.624 ; v1@60.427,5.438 R261.2@61.214,5.438 ; v1(79.23,93.963) 79.247,93.98 R224.2@79.872,93.98
  L3 Inner 2 w0.254: v1(21.336,79.502) 23.783,79.502 25.264,80.983 29.077,80.983 v1@30.416,79.645 ; v1@30.432,79.634 30.799,79.267 31.145,78.922 31.526,78.54 32.009,78.54 v1(32.047,78.502)
  L4 Bottom Layer w0.254: v1(40.105,84.667) 40.079,84.693 40.079,86.886 41.052,87.859 42.862,87.859 43.558,88.555 v1(44.186,88.555)
  other v1: 60.427,5.438 12.294,26.531 12.9,26.541 13.532,26.556 14.12,26.574 14.735,26.583 84.889,89.439 84.896,90.072 85.595,90.709 86.243,90.713 84.889,90.735 86.24,91.348 84.891,91.367 85.604,91.367 86.881,91.381
"3.3V RF ATTEN-AMP": L401.1 L402.1 L404.1 L405.1 L406.1 L407.1 R113.2 | length 72.2
  L1 Top Layer w0.305: L406.1@51.186,66.515 51.334,66.663 51.663,66.663 53.245,68.245 L405.1@55.31,68.245 55.289,68.224 55.289,67.716 v1(55.267,67.695) ; L407.1@60.549,59.947 60.697,60.095 60.936,60.095 61.254,60.412 v1(61.293,60.412) ; L404.1@76.685,65.97 76.833,65.822 76.833,65.306 77.232,64.907 78.311,64.907 78.691,65.287 v1(78.73,65.287) 78.724,65.294 78.724,65.964 L402.1@78.717,65.97 ; v1(80.262,71.733) 80.712,71.733 80.959,71.981 R113.2@80.959,71.992 ; L401.1@90.492,66.199 90.503,66.21 91.464,66.21 v1(91.475,66.221)
  L2 Inner 1 w0.305: v1(62.742,69.181) 66.455,69.181 67.369,68.267 68.109,68.267 68.759,67.618 70.119,67.618 72.771,64.965 78.413,64.965 v1@78.73,65.282
  L3 Inner 2 w0.305: v1@61.278,60.397 58.192,60.397 55.267,63.322 v1(55.267,67.695) 55.295,67.667 55.398,67.667 55.412,67.653 61.214,67.653 v1(62.742,69.181)
  L4 Bottom Layer w0.305: v1(78.73,65.287) 78.73,65.327 78.832,65.428 78.832,70.303 v1(80.262,71.733) 89.767,71.733 91.5,70 91.5,66.246 v1(91.475,66.221)
"3.3V RF SRC - CP": L301.1 L302.1 L304.2 L305.1 L306.1 R114.2 | length 49.5
  L1 Top Layer w0.305: R114.2@100.346,35.319 100.423,35.319 100.671,35.567 100.671,35.645 101.216,36.189 102.56,36.189 103.098,36.727 103.098,36.778 L304.2@103.245,36.925 104.453,36.925 v1(104.541,37.013) ; L301.1@101.847,43.447 101.928,43.367 101.928,42.862 v1(101.956,42.834) ; L305.1@102.047,66.04 102.271,66.263 L306.1@106.111,66.263 106.095,66.246 106.095,65.704 v1(106.078,65.687) ; L302.1@108.197,53.237 109.135,53.237 109.569,52.803 v1(109.609,52.803)
  L3 Inner 2 w0.305: v1(106.078,65.687) 106.078,65.648 105.97,65.54 105.97,56.442 v1(109.609,52.803)
  L4 Bottom Layer w0.305: v1(104.541,37.013) 104.541,38.321 101.966,40.896 101.966,42.824 v1(101.956,42.834) 101.953,42.836 101.953,43.516 101.572,43.897 101.572,44.597 102.182,45.207 103.129,45.207 104.653,45.207 106.814,45.207 107.512,45.905 107.512,48.499 109.622,50.608 v1@109.622,52.79
"3.3V RF SRC - RF": L303.1 R115.2 | length 22
  L1 Top Layer w0.381: L303.1@98.037,53.237 98.041,53.241 98.041,53.87 v1(98.046,53.874) ; v1(103.976,37.714) 103.989,37.701 105.953,37.701 R115.2@106.128,37.525
  L4 Bottom Layer w0.381: v1(98.046,53.874) 99.03,52.89 99.03,41.741 103.057,37.714 v1(103.976,37.714)
"3.3V RF SW.": L501.1 L502.1 L503.1 L504.1 L505.1 L506.1 L601.1 L602.1 R112.2 | length 7.4
  L1 Top Layer w0.254: L602.1@31.496,13.578 31.669,13.751 32.039,13.751 v1(32.766,14.478) ; L506.1@35.945,35.617 35.955,35.607 37.396,35.607 v1(37.407,35.596) ; L502.1@40.017,65.238 40.169,65.086 40.169,64.546 v1(40.207,64.508) ; L503.1@43.945,57.285 44.118,57.458 44.118,57.786 44.269,57.937 v1(44.269,57.99) ; v1(68.915,55.87) 68.922,55.877 L501.1@68.922,56.572 ; L504.1@71.46,14.058 71.46,13.365 v1(71.477,13.349) ; v1(83.412,26.306) 83.417,26.311 83.417,26.86 L505.1@83.422,26.865 ; L601.1@103.496,13.589 v1(104.154,13.589)
  other v1: 32.512,19.558 33.02,19.558 33.528,19.558 32.512,20.066 33.02,20.066 37.084,27.686 37.084,28.194 37.084,28.702 37.084,29.21 37.084,29.718 37.084,40.386 37.084,40.894 37.084,41.402 37.084,41.91 37.084,42.418 43.899,49.683 44.194,50.319 44.361,50.989 44.281,51.639 43.999,52.202 44.646,58.397 45.254,58.408 45.839,58.411 65.903,72.842 66.64,72.864 67.342,72.86 65.124,72.89 64.181,72.902 65.933,73.635 67.295,73.673 66.618,73.695
5V: C101.2 C102.2 C103.2 L101.1 Q201.1 Q201.2 Q201.3 TP201.1 U101.B1 U101.C2 U102.10 U102.11 | length 6.8
  L1 Top Layer w0.508: TP201.1@71.314,89.725 71.314,90.908 Q201.1@71.28,90.942 Q201.2@71.28,91.592 Q201.3@71.28,92.242 71.324,92.198 72.83,92.198 C101.2@72.94,92.088 ; v1(94.631,88.566) 95.219,88.566 C102.2@95.735,89.082
  L4 Bottom Layer w0.381: v1(93.422,88.468) 93.52,88.566 v1(94.631,88.566)
  other v1: 96.812,88.986 96.801,89.581 95.239,89.941 96,89.947 96.842,90.206 95.565,90.437 96.306,90.457 75.254,91.294 74.262,91.331 74.779,91.588 73.82,91.658 75.262,91.807 74.295,91.889 107.222,92.169 73.807,92.192 74.791,92.191 106.218,92.203 74.262,92.402 106.773,92.467 107.428,92.7 106.257,92.906 106.87,93.043 107.389,93.437 106.53,93.513
"5V RF": C119.2 C120.2 R110.2 U107.1 U107.3 U108.1 U108.3 | length 29.3
  L1 Top Layer w0.305: U107.1@70.88,74.872 70.732,75.02 70.239,75.02 69.782,75.477 69.782,76.201 70.205,76.624 70.732,76.624 U107.3@70.88,76.772 70.941,76.711 72.737,76.711 73.045,76.402 73.045,76.36 73.6,75.805 R110.2@74.557,75.805 74.864,75.498 v1(74.864,75.252) ; U108.1@86.785,72.5 86.638,72.647 86.149,72.647 85.73,73.066 85.73,73.893 86.089,74.252 86.638,74.252 U108.3@86.785,74.4 86.846,74.339 88.542,74.339 C120.2@88.603,74.278 88.617,74.291 89.395,74.291 v1(89.409,74.304)
  L4 Bottom Layer w0.305: v1(74.864,75.252) 74.903,75.252 75.006,75.354 88.358,75.354 v1(89.409,74.304)
"5V RF Log Det.": L507.1 L508.1 R109.2 | length 24.1
  L1 Top Layer w0.305: L508.1@27.858,43.546 27.582,43.822 27.449,43.822 26.731,44.541 26.731,54.119 27.65,55.039 27.898,55.286 R109.2@27.998,55.286 ; L508.1@27.878,43.527 27.878,43.305 30.157,41.026 34.358,41.026 36.506,43.174 36.506,43.538 L507.1@36.642,43.675
"5V RF SRC": C121.2 C122.2 R111.2 U106.3 U109.1 U109.3 | length 16.5
  L1 Top Layer w0.305: U109.1@104.707,32.803 104.855,32.951 104.855,33.54 105.288,33.973 106.087,33.973 106.46,33.6 106.46,32.951 U109.3@106.607,32.803 106.611,32.799 106.611,30.987 C121.2@106.615,30.983 106.615,31.083 107.42,31.888 107.426,31.888 107.426,34.388 108.507,35.469 109.093,35.469 109.327,35.702 109.079,35.95 109.079,36.17 108.648,36.601 108.648,37.164 108.3,37.511 C122.2@108.16,37.511 108.43,37.781 110.232,37.781 U106.3@110.446,37.995
6V: C110.2 C111.2 C112.2 R108.2 U103.4 U103.6 U104.4 U104.6 U105.4 U105.6 | length 12.6
  L1 Top Layer w0.381: U103.6@36.126,57.262 C110.2@36.126,58.842 ; U103.4@36.302,55.352 36.87,55.92 36.87,56.684 U103.6@36.302,57.252 ; U104.6@82.661,77.771 C111.2@84.592,77.771 ; U104.4@82.861,75.871 83.43,76.439 83.43,77.203 U104.6@82.861,77.771 ; U105.4@109.393,27.698 109.393,27.498 109.961,26.93 110.724,26.93 111.293,27.498 U105.6@111.293,27.698 ; U105.6@111.293,27.684 111.302,27.674 C112.2@112.883,27.674
  other v1: 110.909,26.681 111.891,26.688 112.438,26.729 112.958,26.794 111.417,26.907 112.101,27.205 36.96,57.382 36.461,57.669 36.948,57.961 36.914,58.604 36.917,59.153 36.052,59.635 36.582,59.67 82.518,78.359 83.201,78.359 83.745,78.359 84.407,78.477 82.903,78.781 83.524,78.822 84.858,78.828 84.072,78.94 115.265,90.286 115.539,90.808 115.194,91.222 114.373,91.611 115.501,91.668 114.955,91.736
F_REF: C304.1 TP301.1 U302.3 | length 2.5
  L1 Top Layer w0.32: U302.3@103.879,40.907 103.883,40.911 103.883,43.434 C304.1@103.887,43.438
GND: C101.1 C102.1 C103.1 C104.1 C106.1 C107.1 C108.1 C109.1 C110.1 C111.1 C112.1 C113.1 C114.1 C115.1 C116.1 C117.1 C118.1 C119.1 C120.1 C121.1 C122.1 C123.1 C124.1 C125.1 C126.1 C127.1 C128.1 C129.1 C130.1 C131.1 C201.1 C202.1 C203.1 C204.1 C205.1 C206.1 C207.1 C208.1 C209.1 C210.1 C211.1 C212.1 C213.1 C214.1 C215.1 C216.1 C217.1 C218.1 C219.1 C222.2 C301.1 C302.1 C303.1 C305.1 C306.2 C307.2 C308.2 C309.2 C310.2 C311.2 C312.1 C313.1 C315.2 C316.1 C317.1 C319.2 C321.2 C322.1 C323.1 C324.1 C325.2 C326.1 C327.1 C328.2 C330.1 C331.1 C401.1 C402.1 C403.1 C404.1 C405.1 C406.1 C407.1 C408.1 C409.1 C410.1 C411.1 C412.1 C413.1 C414.1 C415.1 C416.1 C417.2 C419.1 C420.1 C421.1 C422.1 C423.1 C424.1 C425.1 C427.1 C428.1 C429.1 C432.1 C433.1 C434.1 C435.1 C503.1 C504.1 C505.1 C506.1 C507.1 C508.1 C509.1 C510.1 C511.1 C512.1 C513.1 C514.1 C515.1 C516.1 C517.1 C518.1 C519.1 C520.1 C521.1 C523.1 C524.1 C525.1 C526.1 C527.1 C528.1 C529.1 C530.1 C531.1 C532.1 C603.1 C604.1 C605.1 C606.1 C607.1 C608.1 C609.1 C610.1 D201.1 D202.1 D203.1 D204.1 D206.2 D207.2 D208.2 D209.2 D210.2 D211.2 D212.2 D213.2 D214.2 D215.2 D216.1 D601.1 D602.1 D603.1 D604.1 FL301.3 FL301.4 FL302.3 FL302.4 FL303.3 FL303.4 FL501.1 FL501.2 FL501.3 FL501.4 FL501.5 FL501.6 FL501.7 FL501.8 FL501.9 FL501.11 FL501.12 FL501.13 FL501.14 FL501.16 FL501.17 FL501.18 FL501.19 FL501.20 FL501.21 FL501.22 FL501.23 FL501.25 J201.A1B12 J201.B1A12 J201.SH1 J201.SH2 J201.SH3 J201.SH4 J202.2 J202.MP1 J202.MP2 J601.0 J602.0 J603.0 J604.0 M1.1 M2.1 M3.1 M4.1 M5.1 M6.1 M7.1 M8.1 M9.1 M10.1 M11.1 M12.1 M13.1 M14.1 M15.1 M16.1 M17.1 M18.1 M19.1 M20.1 M21.1 M22.1 M23.1 R101.2 R103.1 R105.1 R204.1 R205.1 R207.1 R303.2 R305.1 R308.1 R311.2 R315.2 R316.2 R319.2 R320.2 R505.2 R506.2 R507.2 R508.2 R509.1 R510.1 R517.2 R518.2 R519.1 R520.1 R521.2 R522.2 R529.1 R530.1 R531.2 R532.2 R533.2 R534.2 R535.1 R536.1 R539.2 R605.2 R606.2 S201.1 S201.3 S202.1 S202.3 S203.0 S203.1 U101.A1 U102.4 U102.5 U102.6 U102.13 U103.1 U103.7 U104.1 U104.7 U105.1 U105.7 U106.1 U107.2 U108.2 U109.2 U201.4 U202.62 U202.81 U203.0 U203.1 U203.2 U203.3 U203.4 U203.7 U301.8 U301.9 U301.11 U301.18 U301.21 U301.27 U301.31 U301.33 U302.2 U303.5 U303.8 U303.10 U303.12 U303.13 U304.5 U304.8 U304.10 U304.12 U304.13 U401.3 U401.4 U401.6 U401.7 U401.8 U401.9 U401.10 U401.11 U401.12 U401.13 U401.15 U401.17 U401.18 U401.25 U402.3 U402.4 U402.6 U402.8 U402.9 U403.1 U403.2 U403.4 U403.5 U403.6 U403.7 U403.9 U403.10 U403.11 U403.12 U403.14 U403.15 U403.18 U403.19 U403.21 U404.1 U404.2 U404.4 U404.5 U404.6 U404.7 U404.9 U404.10 U404.11 U404.12 U404.14 U404.15 U404.17 U404.18 U404.19 U404.21 U405.1 U405.2 U405.4 U405.5 U405.6 U405.7 U405.9 U405.10 U405.11 U405.12 U405.14 U405.15 U405.16 U405.18 U405.19 U405.21 U501.5 U501.8 U501.10 U501.12 U501.13 U502.5 U502.8 U502.10 U502.12 U502.13 U503.5 U503.8 U503.10 U503.12 U503.13 U504.5 U504.8 U504.10 U504.12 U504.13 U505.5 U505.8 U505.10 U505.12 U505.13 U506.5 U506.8 U506.10 U506.12 U506.13 U507.1 U507.2 U507.8 U507.11 U507.12 U507.17 U601.1 U601.2 U601.4 U601.5 U601.6 U601.7 U601.9 U601.10 U601.11 U601.12 U601.14 U601.15 U601.18 U601.19 U601.21 U602.1 U602.2 U602.4 U602.5 U602.6 U602.7 U602.9 U602.10 U602.11 U602.12 U602.14 U602.15 U602.18 U602.19 U602.21 Y201.2 Y201.4 | length 52.9
  L1 Top Layer w0.203: C424.1@19.812,74.579 C423.1@20.828,74.579 ; U203.4@24.271,79.085 U203.3@24.271,79.585 U203.2@24.271,80.085 U203.1@24.271,80.585 ; U203.0@25.521,79.585 U203.0@25.771,79.835 ; v1(26.235,80.11) 26.26,80.085 U203.7@27.271,80.085 27.32,80.134 27.79,80.134 27.99,80.333 27.99,80.901 28.297,81.208 28.297,81.417 C222.2@28.495,81.615 28.5,81.61 29.462,81.61 C208.1@29.468,81.604 ; Y201.4@26.67,86.374 26.67,86.499 27.048,86.877 v1(27.406,86.877) ; v1(27.95,86.742) 27.998,86.695 27.998,86.44 C202.1@28.194,86.244 28.263,86.175 29.141,86.175 C211.1@29.21,86.106 ; v1(28.374,87.166) 28.388,87.179 28.759,87.179 C213.1@29.21,87.63 ; C532.1@30.016,42.405 30.001,42.42 30.001,42.889 v1(29.985,42.904) 30.001,42.92 30.001,43.405 C531.1@30.016,43.421 ; U506.5@32.749,34.036 32.749,33.286 v1(32.949,33.086) ; v1(33.963,78.698) 33.971,78.691 33.971,77.985 C214.1@33.978,77.978 C216.1@35.11,77.978 C210.1@35.11,76.962 ; C217.1@42.106,77.978 42.304,77.78 42.304,77.608 42.651,77.262 43.482,77.262 43.768,77.548 43.768,77.643 C207.1@43.966,77.842 ; C205.1@43.12,81.384 C206.1@44.095,81.384 ; U503.5@45.522,54.067 46.169,54.067 U503.13@46.176,54.074 ; U503.13@46.672,54.067 U503.10@47.422,54.067 ; U501.10@65.445,59.79 66.195,59.79 U501.8@66.195,60.54 ; v1(66.395,59.59) cw(c66.877,59.108) 66.877,59.79 U501.5@67.345,59.79 ; U504.10@67.982,17.277 U504.13@68.732,17.277 ; U504.13@69.132,17.277 U504.5@69.882,17.277 ; U505.13@86.417,29.396 ccw(c86.417,29.596) 86.617,29.596 U505.10@86.617,30.346 ; U102.5@102.091,86.577 103.038,86.577 v1(103.091,86.63) ; U102.4@102.091,87.077 103.03,87.077 v1(103.091,87.138)
  L1 Top Layer w0.254: U507.2@30.236,47.302 31.044,47.302 v1(31.207,47.465) ; U507.1@30.236,47.952 31.211,47.952 U507.17@32.186,46.977 33.161,47.952 U507.12@34.136,47.952 ; C521.1@31.678,51.549 31.707,51.578 31.707,52.536 R535.1@31.736,52.565 ; U506.8@31.999,32.886 32.749,32.886 U506.10@32.749,32.136 ; U507.17@33.157,45.845 33.161,45.841 U507.8@33.161,45.027 ; v1(33.239,47.465) 33.402,47.302 U507.11@34.136,47.302 ; R534.2@35.945,31.553 35.956,31.565 35.956,32.051 v1(35.967,32.063) 35.956,32.074 35.956,32.558 R532.2@35.945,32.569 ; v1(43.036,67.766) 43.236,67.566 U502.5@43.236,66.816 ; U502.10@43.236,68.716 43.236,67.966 U502.8@43.986,67.966 ; U503.8@46.672,53.317 U503.13@46.672,54.067 ; U504.13@68.732,17.277 U504.8@68.732,18.027 ; U402.6@75.381,69.406 76.058,69.406 76.177,69.287 v1(76.177,69.156) ; R531.2@83.422,29.913 83.541,30.031 83.541,30.371 v1(83.578,30.408) 83.541,30.446 83.541,30.81 R533.2@83.422,30.929 ; U505.13@86.417,29.396 86.617,29.196 U505.5@86.617,28.446 ; U301.21@101.187,48.082 v1(101.811,48.082) ; U304.10@102.875,71.427 103.625,71.427 U304.13@103.825,71.227 ; U301.27@102.888,45.836 102.894,45.842 102.894,46.472 v1(102.901,46.479) ; U303.5@103.383,60.876 104.133,60.876 v1(104.333,61.076) 104.533,60.876 U303.10@105.283,60.876 ; v1(103.818,71.221) U304.13@103.825,71.227 ; v1(104.373,50.185) 104.38,50.192 104.38,50.775 U301.11@104.387,50.782 ; U304.5@104.493,71.427 104.024,71.427 U304.13@103.825,71.227 ; v1(104.873,46.479) 104.88,46.472 104.88,45.889 U301.31@104.887,45.882 ; C307.2@108.705,49.289 108.719,49.276 108.719,48.928 v1(108.732,48.915)